# EAGLE board board (EAGLE 9.1.1)
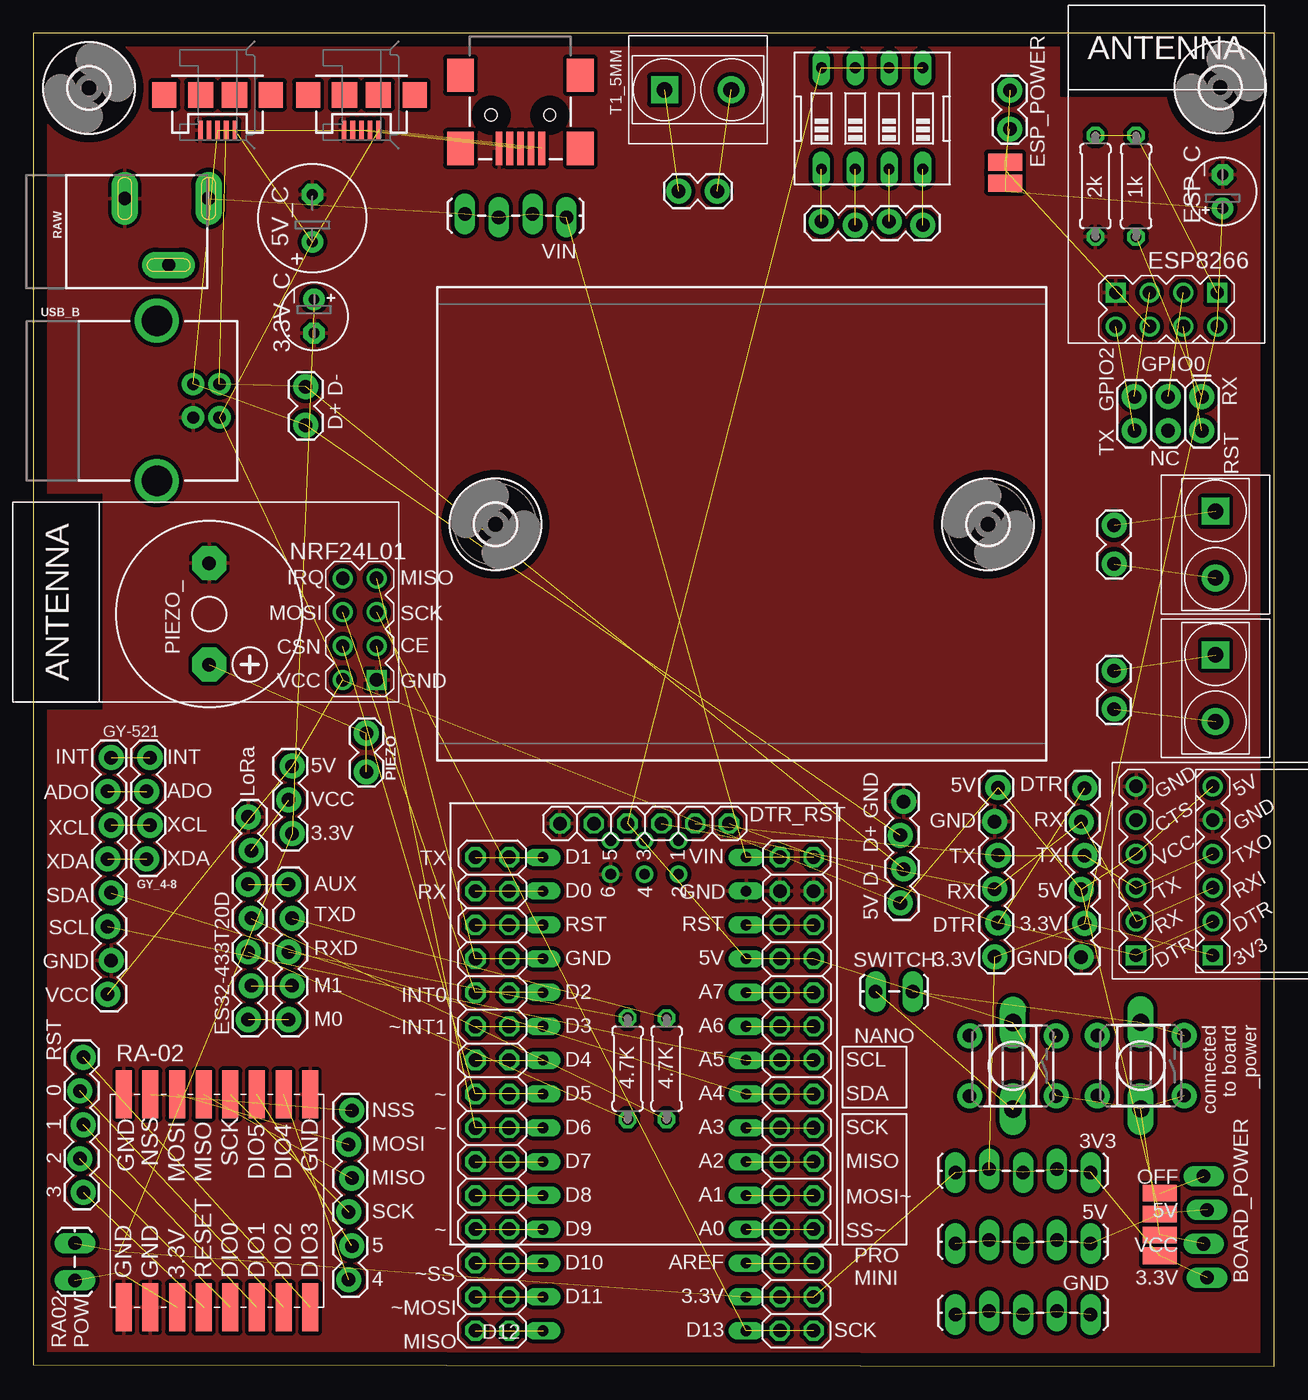
[diagram p0: board, top side]
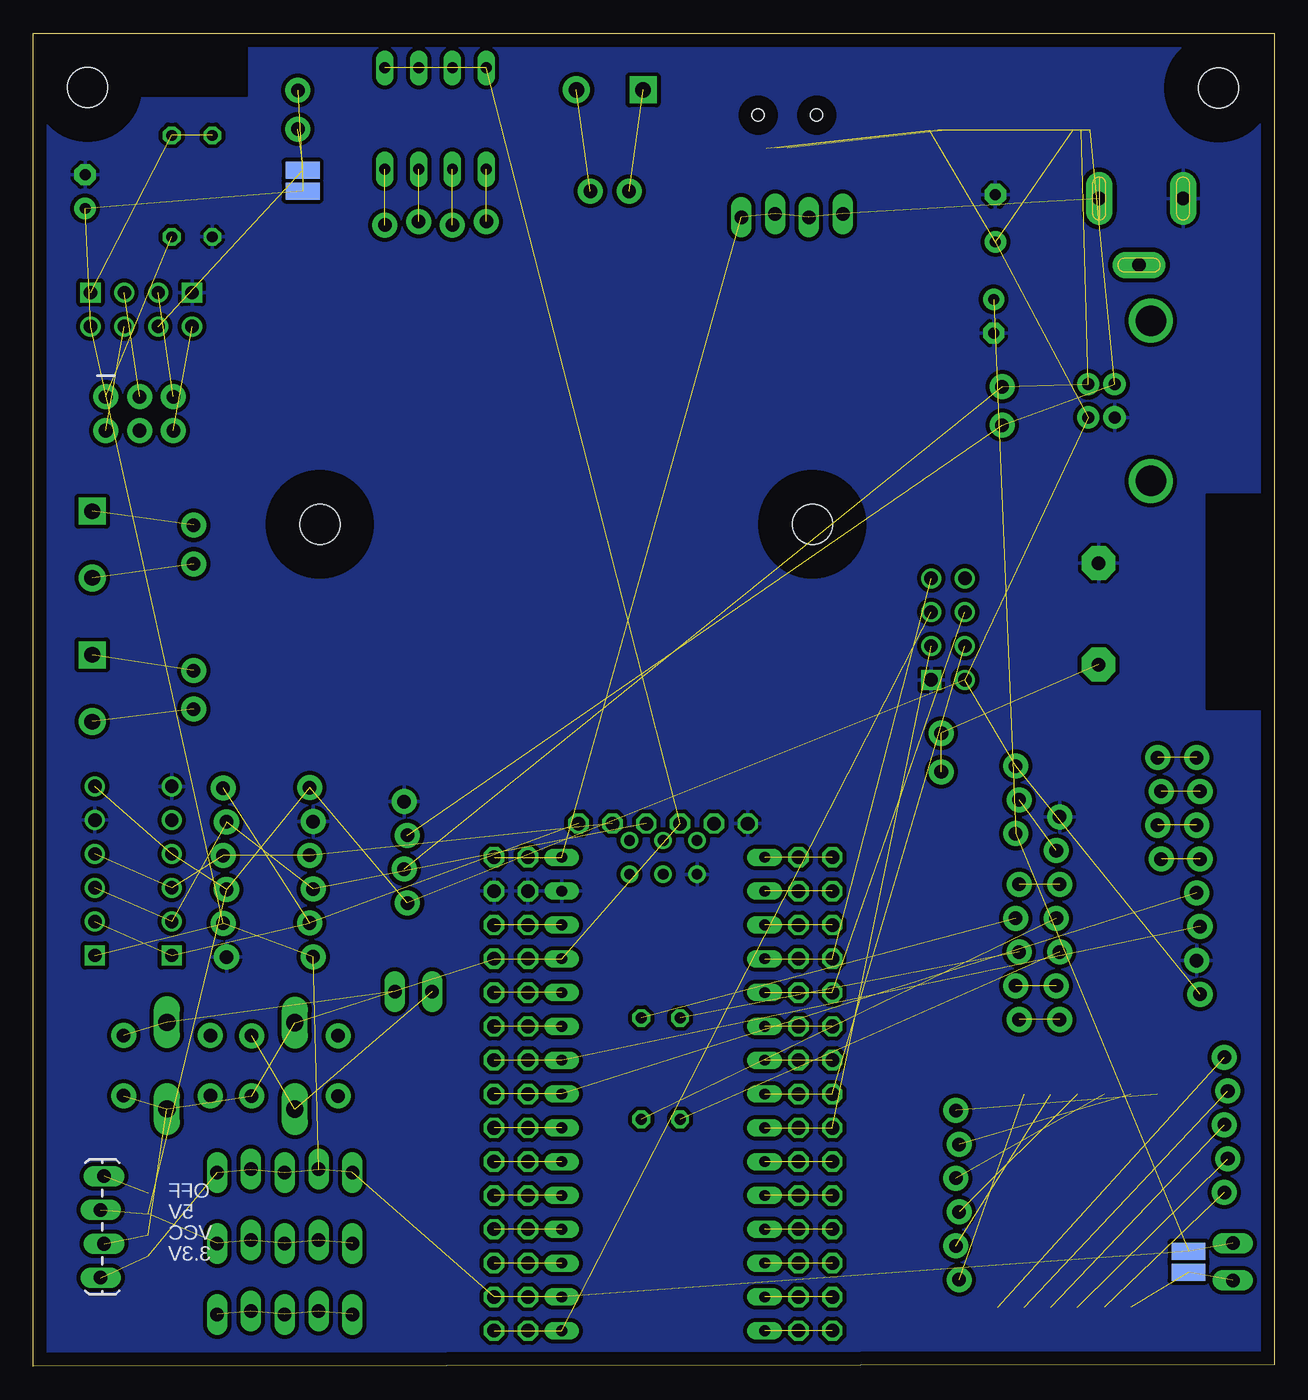
[diagram p1: board, bottom side, seen from below]

Size 93.2 x 100.13 mm. Coordinates in mm from the lower left corner, seen from the top.
Outline: 0,0.13 93.2,0 93.2,100.13 0,100.13 0,0.13
Copper layers (1*16): Top 0.035mm / dielectric 1.5mm / Bottom 0.035mm
Design rules "default": minimum track width 6mil, minimum drill 0.35mm, track to track 6mil, track to pad 6mil, pad to pad 6mil, via to via 6mil, smd to smd 6mil, copper to edge 40mil, drill to drill 6mil, minimum pad ring 10mil, minimum via ring 8mil, stop-mask expansion 4mil, vias tented up to drill 0mil, thermal gap 10mil
Net classes: 0 default: width 0.165 mm, drill 0.127 mm, clearance 0.152 mm; 1 power: width 0.762 mm, clearance 0.305 mm; 2 terminal: width 2.54 mm, clearance 0.305 mm
tRestrict: area 0.5,49.4 to 5.1,65.5; area 77.1,95.4 to 92.6,99.2
bRestrict: area 0.5,49.4 to 5.1,65.5; area 77.1,95.4 to 92.6,99.2

## Footprints (pad centres in the part's own frame; a part is rotated, then mirrored left to right if it is on the bottom)
1X03_LOCK = drill 1.016 pad 1.88: 1 0,0.127; 2 2.54,-0.127; 3 5.08,0.127
1X05_LOCK_LONGPADS = drill 1.016 long: 1 0,0; 2 2.54,-0.254; 3 5.08,0; 4 7.62,-0.254; 5 10.16,0
E2,5-5 = drill 0.813 pad 1.6: + -1.27,0 | drill 0.813 pad 1.6 octagon: - 1.27,0
E3,5-8 = drill 0.813 pad 1.6: + -1.778,0 | drill 0.813 pad 1.6 octagon: - 1.778,0
1X04_LOCK_LONGPADS = drill 1.016 long: 1 0,0; 2 2.54,-0.254; 3 5.08,0; 4 7.62,-0.254
USB-SERIAL-CP2102 = drill 1 square: 1 8.89,6.35 | drill 1: 2 8.89,3.81; 3 8.89,1.27; 4 8.89,-1.27; 5 8.89,-3.81; 6 8.89,-6.35
1X07_LOCK = drill 1.016 pad 1.88: 1 0,0.127; 2 2.54,-0.127; 3 5.08,0.127; 4 7.62,-0.127; 5 10.16,0.127; 6 12.7,-0.127; 7 15.24,0.127
0207/7 = drill 0.813 octagon: 1 -3.81,0; 2 3.81,0
WIRELESS-WIFI-ESP-01 = drill 1 square: A1 -8.89,3.81; D1 -8.89,-3.81 | drill 1: A2 -11.43,3.81; B1 -8.89,1.27; B2 -11.43,1.27; C1 -8.89,-1.27; C2 -11.43,-1.27; D2 -11.43,-3.81
2X3 = drill 1.016 pad 1.88: 1 0,0; 2 0,2.54; 3 2.54,0; 4 2.54,2.54; 5 5.08,0; 6 5.08,2.54
1X02_LOCK = drill 1.016 pad 1.88: 1 -0.178,0; 2 2.718,0
1X08_LOCK = drill 1.016 pad 1.88: 1 0,0.127; 2 2.54,-0.127; 3 5.08,0.127; 4 7.62,-0.127; 5 10.16,0.127; 6 12.7,-0.127; 7 15.24,0.127; 8 17.78,-0.127
1X04_LOCK = drill 1.016 pad 1.88: 1 0,0.127; 2 2.54,-0.127; 3 5.08,0.127; 4 7.62,-0.127
3,0 = hole 3: 0,0
1X05_LOCK = drill 1.016 pad 1.88: 1 0,0.127; 2 2.54,-0.127; 3 5.08,0.127; 4 7.62,-0.127; 5 10.16,0.127
1X02_LOCK_LONGPADS = drill 1.016 long: 1 -0.127,0; 2 2.667,0
1X06_LOCK = drill 1.016 pad 1.88: 1 0,0; 2 2.54,-0.254; 3 5.08,0; 4 7.62,-0.254; 5 10.16,0; 6 12.7,-0.254
USB-MICROB = smd 1.4 x 0.35: D+ -2.65,0; D- -2.65,-0.65; GND -2.65,1.3; ID -2.65,0.65; VBUS -2.65,-1.3 | smd 1.9 x 1.8: MT1 0,-4; MT2 0,4 | smd 1.9 x 1.9: P$1 0,-1.27; P$2 0,1.27
USB-MINIB = smd 2.5 x 0.5: D+ 2.5,0; D- 2.5,0.8; GND 2.5,-1.6; ID 2.5,-0.8; VBUS 2.5,1.6 | smd 2.5 x 2: S1 -3,4.5; S2 2.5,4.5; S3 -3,-4.5; S4 2.5,-4.5 | hole 0.9: 0,2.2; 0,-2.2
NANO = drill 0.8 long: 3.3V -10.16,24.13; 5V -10.16,-1.27; A0 -10.16,19.05; A1 -10.16,16.51; A2 -10.16,13.97; A3 -10.16,11.43; A4 -10.16,8.89; A5 -10.16,6.35; A6 -10.16,3.81; A7 -10.16,1.27; AREF -10.16,21.59; D2 5.08,1.27; D3 5.08,3.81; D4 5.08,6.35; D5 5.08,8.89; D6 5.08,11.43; D7 5.08,13.97; D8 5.08,16.51; D9 5.08,19.05; D10 5.08,21.59; D11 5.08,24.13; D12 5.08,26.67; D13 -10.16,26.67; GND -10.16,-6.35; GND1 5.08,-1.27; RAW -10.16,-8.89; RST -10.16,-3.81; RST1 5.08,-3.81; RX1 5.08,-6.35; TX0 5.08,-8.89 | drill 0.8: ICSP1 -5.08,-10.16; ICSP2 -5.08,-7.62; ICSP3 -2.54,-10.16; ICSP4 -2.54,-7.62; ICSP5 0,-10.16; ICSP6 0,-7.62
WIRELESS-NRF24L01 = drill 1 square: 1 -12.7,6.35 | drill 1: 2 -10.16,6.35; 3 -12.7,3.81; 4 -10.16,3.81; 5 -12.7,1.27; 6 -10.16,1.27; 7 -12.7,-1.27; 8 -10.16,-1.27
SMD1,27-2,54 = smd 1.27 x 2.54: 1 0,0
2X15 = drill 1.016 octagon: 1 -17.78,-1.27; 2 -17.78,1.27; 3 -15.24,-1.27; 4 -15.24,1.27; 5 -12.7,-1.27; 6 -12.7,1.27; 7 -10.16,-1.27; 8 -10.16,1.27; 9 -7.62,-1.27; 10 -7.62,1.27; 11 -5.08,-1.27; 12 -5.08,1.27; 13 -2.54,-1.27; 14 -2.54,1.27; 15 0,-1.27; 16 0,1.27; 17 2.54,-1.27; 18 2.54,1.27; 19 5.08,-1.27; 20 5.08,1.27; 21 7.62,-1.27; 22 7.62,1.27; 23 10.16,-1.27; 24 10.16,1.27; 25 12.7,-1.27; 26 12.7,1.27; 27 15.24,-1.27; 28 15.24,1.27; 29 17.78,-1.27; 30 17.78,1.27
F/CM12P = drill 1.016 pad 2.54 octagon: + 3.81,0; - -3.81,0
1X06/OCT = drill 1.016 octagon: 1 -6.35,0; 2 -3.81,0; 3 -1.27,0; 4 1.27,0; 5 3.81,0; 6 6.35,0
LORA-RA2-SMD = smd 3.6 x 1.2: 1 -8,7; 2 -8,5; 3 -8,3; 4 -8,1; 5 -8,-1; 6 -8,-3; 7 -8,-5; 8 -8,-7; 9 8,-7; 10 8,-5; 11 8,-3; 12 8,-1; 13 8,1; 14 8,3; 15 8,5; 16 8,7
POWER_JACK_SLOT = drill 1 pad 2 long: GND@1 2.58,7.5; GND@2 7.58,10.8; PWR 2.58,13.8
TACTILE_SWITCH_PTH_6.0MM = drill 1.016 pad 1.88: 1 -3.251,2.261; 2 3.251,2.261; 3 -3.251,-2.261; 4 3.251,-2.261
DTS-3 = drill 1.3 long: 1 -3.25,0; 2 3.25,0
EDG-04 = drill 0.813 long: 1 -3.81,-3.81; 2 -1.27,-3.81; 3 1.27,-3.81; 4 3.81,-3.81; 5 3.81,3.81; 6 1.27,3.81; 7 -1.27,3.81; 8 -3.81,3.81
H2-5.0-10.5X8.0MM = drill 1.168 pad 2.032 square: 1 0,2.5 | drill 1.168 pad 2.032: 2 0,-2.5
USB-SERIAL-FT232R = drill 1 square: 1 11.43,6.35 | drill 1: 2 11.43,3.81; 3 11.43,1.27; 4 11.43,-1.27; 5 11.43,-3.81; 6 11.43,-6.35
USB-B-PTH = drill 0.914 pad 1.676: D+ 4,1.25; D- 5.981,1.25; GND 4,-1.25; VBUS 5.981,-1.25 | drill 2.286: SHLD1 1.282,-6.02; SHLD2 1.282,6.02

## Placement (x,y rotation side)
3.3/5  [1X03_LOCK]  19.3,45.09 270 top
3.3V  [1X05_LOCK_LONGPADS]  79.4,14.55 180 top
3.3V_C  [E2,5-5]  21.08,78.87 270 top
5V  [1X05_LOCK_LONGPADS]  79.4,9.22 180 top
5V_C  [E3,5-8]  20.95,86.23 90 top
B1  BREADBOARDMINI  [BREADBOARD-MINI]  53.19,63.27 180 top
BOARD_POWER  [1X04_LOCK_LONGPADS]  87.88,14.27 270 bottom
CP2102_USB-SERIAL  USB-SERIAL-CP2102  [USB-SERIAL-CP2102]  97.46,37.21 180 top
ES32-433T20D  [1X07_LOCK]  16.26,26.04 90 top
ESP1  1k  [0207/7]  82.8,88.65 270 top
ESP2  2k  [0207/7]  79.76,88.65 90 top
ESP8266  [WIRELESS-WIFI-ESP-01]  85.09,89.53 90 top
ESP_C  [E2,5-5]  89.31,88.24 90 top
ESP_H  [2X3]  87.76,72.82 180 top
ESP_POW  [1X02_LOCK]  73.33,95.66 270 top
GND  [1X05_LOCK_LONGPADS]  79.4,3.89 180 top
GY-521  [1X08_LOCK]  5.71,27.94 90 top
GY_4-8  [1X04_LOCK]  8.64,45.72 270 top
H1  MOUNT-HOLE3.0  [3,0]  4.19,96.01 0 top
H2  MOUNT-HOLE3.0  [3,0]  89.13,96.06 0 top
H3  MOUNT-HOLE3.0  [3,0]  71.68,63.25 90 top
H4  MOUNT-HOLE3.0  [3,0]  34.7,63.25 270 top
J1  [1X05_LOCK]  19.3,26.04 90 top
J2  [1X02_LOCK_LONGPADS]  65.91,28.14 180 top
J3  [1X02_LOCK_LONGPADS]  3.12,9.12 270 top
J4  [1X04_LOCK]  66.8,85.85 180 top
J5  [1X06_LOCK]  23.93,19.2 270 top
J6  [1X05_LOCK]  3.63,23.22 270 top
J7  [1X06_LOCK]  78.69,30.73 90 top
J8  [1X04_LOCK]  65.23,34.8 90 top
J9  [1X06_LOCK]  72.19,30.76 90 top
MICRO_1  [USB-MICROB]  24.64,95.5 90 top
MICRO_2  [USB-MICROB]  13.84,95.5 90 top
MINI_1  USB_MINI-B_SMT  [USB-MINIB]  36.58,93.98 270 top
NANO  NANO  [NANO]  43.36,29.34 180 top
NRF24L01  [WIRELESS-NRF24L01]  13.08,57.91 180 top
PAD1  [SMD1,27-2,54]  72.97,88.87 90 top
PAD2  [SMD1,27-2,54]  72.97,90.45 90 top
PAD3  [SMD1,27-2,54]  6.45,8.64 90 bottom
PAD4  [SMD1,27-2,54]  6.45,7.06 90 bottom
PAD5  [SMD1,27-2,54]  72.97,88.27 90 bottom
PAD6  [SMD1,27-2,54]  72.97,89.84 90 bottom
PAD7  [SMD1,27-2,54]  84.58,8.28 270 top
PAD8  [SMD1,27-2,54]  84.58,11.43 270 top
PAD9  [SMD1,27-2,54]  84.58,9.86 270 top
PAD10  [SMD1,27-2,54]  84.58,13 270 top
PH1  [2X15]  57.33,20.45 90 top
PH2  [2X15]  34.47,20.45 90 top
PIEZO  [1X02_LOCK]  25.02,44.83 90 top
PIEZO_  [F/CM12P]  13.21,56.52 270 top
PIN1  [1X02_LOCK]  51.18,88.27 180 top
PIN2  [1X02_LOCK]  81.15,60.45 90 top
PIN3  [1X02_LOCK]  81.15,49.53 90 top
PROMINI_H  [1X06/OCT]  45.9,40.77 0 top
R1  4.7k  [0207/7]  47.55,22.35 270 top
R2  4.7K  [0207/7]  44.63,22.35 270 top
RA-02  [LORA-RA2-SMD]  13.79,12.42 90 top
RAW  [POWER_JACK_SLOT]  -0.64,90.3 270 top
S1  MOMENTARY-SWITCH-SPST-PTH-6.0MM  [TACTILE_SWITCH_PTH_6.0MM]  83.16,22.58 180 top
S2  MOMENTARY-SWITCH-SPST-PTH-6.0MM  [TACTILE_SWITCH_PTH_6.0MM]  73.56,22.56 180 top
S3  DTS-3  [DTS-3]  83.16,22.58 90 top
S4  DTS-3  [DTS-3]  73.56,22.56 90 top
SW1  [EDG-04]  62.99,93.73 0 top
T1_5MM  5mm  [H2-5.0-10.5X8.0MM]  49.91,95.88 90 top
T2_5MM  5mm  [H2-5.0-10.5X8.0MM]  88.77,61.72 0 top
T3_5MM  5mm  [H2-5.0-10.5X8.0MM]  88.77,50.93 0 top
U$1  USB-SERIAL-FT232R  [USB-SERIAL-FT232R]  94.23,37.21 180 top
USB_B  [USB-B-PTH]  8,72.52 0 top
USB_DATA  [1X02_LOCK]  20.45,73.41 270 top
VIN  [1X04_LOCK_LONGPADS]  32.41,86.56 0 top

## Library data of the parts
3.3/5 3.3V 5V ES32-433T20D ESP_POW GND GY-521 J1-J3 J5-J7 J9 PIEZO PIN1-PIN3 USB_DATA = SparkFun-Connectors
3.3V_C ESP_C = rcl; SPICEPREFIX: C
5V_C = resistor
B1 = SparkFun-Boards; PROD_ID: COMP-12034
BOARD_POWER GY_4-8 J4 J8 VIN = SparkFun-Connectors; PROD_ID: CONN-09696
CP2102_USB-SERIAL ESP8266 NRF24L01 U$1 = diy-modules
ESP1 ESP2 R1 R2 = rcl; SPICEPREFIX: R
ESP_H = SparkFun-Connectors; PROD_ID: CONN-11566; VALUE: FEMALE 2x3
H1-H4 = holes
MICRO_1 MICRO_2 = SparkFun-Connectors; PROD_ID: CONN-09505; SF_ID: PRT-08533
MINI_1 = SparkFun-Connectors; PROD_ID: CONN-08193; SF_ID: PRT-00587
NANO = Arduino-clone
PAD1-PAD10 = wirepad
PH1 PH2 = pinhead
PIEZO_ = buzzer; OC_FARNELL: unknown; OC_NEWARK: unknown
PROMINI_H = pinhead_v2
RA-02 = LikeCircuit
RAW = SparkFun-Connectors; PROD_ID: PRT-00119
S1 S2 = SparkFun-Switches; PROD_ID: SWCH-08441; SF_SKU: COM-00097
S3 S4 = switch-tact
SW1 = special
T1_5MM T2_5MM T3_5MM = Seeed-Connector
USB_B = SparkFun-Connectors; PROD_ID: CONN-08278; SF_ID: PRT-00139

## Nets
3.3V [power]: 3.3/5.3 3.3V.1 3.3V.2 3.3V.3 3.3V.4 3.3V.5 3.3V_C.+ BOARD_POWER.4 CP2102_USB-SERIAL.1 ESP8266.D2 ESP_C.+ ESP_POW.1 J3.1 J7.2 J9.1 NANO.3.3V PAD1.1 PAD3.1 PAD5.1 PAD7.1 PH1.3 PH1.4
5V [power]: 3.3/5.1 5V.1 5V.2 5V.3 5V.4 5V.5 5V_C.+ BOARD_POWER.2 CP2102_USB-SERIAL.6 GY-521.1 J7.3 J8.1 J9.6 MICRO_1.VBUS MICRO_2.VBUS MINI_1.VBUS NRF24L01.2 PAD8.1 U$1.4 USB_B.VBUS
A5: GY-521.3 NANO.A5 PH1.17 PH1.18
A6: NANO.A6 PH1.19 PH1.20
A7: NANO.A7 PH1.21 PH1.22
CE_NRF: NANO.D6 NRF24L01.3 PH2.13 PH2.14
CSN_NRF: NANO.D5 NRF24L01.4 PH2.15 PH2.16
D+_5PIN: J8.3 MICRO_1.D+ MICRO_2.D+ MINI_1.D+ USB_B.D+ USB_DATA.2
D-_5PIN: J8.2 MICRO_1.D- MICRO_2.D- MINI_1.D- USB_B.D- USB_DATA.1
GND [power]: 3.3V_C.- 5V_C.- CP2102_USB-SERIAL.5 ES32-433T20D.7 ESP2.1 ESP8266.A1 ESP_C.- GY-521.2 J7.1 J8.4 J9.5 MICRO_1.GND MICRO_2.GND MINI_1.GND NANO.GND NANO.ICSP6 NRF24L01.1 PH1.27 PH1.28 PIEZO_.- PROMINI_H.1 RA-02.1 RA-02.2 RA-02.9 RA-02.16 RAW.GND@1 U$1.6 USB_B.GND
MISO_NRF: NANO.GND1 NRF24L01.7 PH2.23 PH2.24
MOSI_NRF: NANO.D2 NRF24L01.6 PH2.21 PH2.22
N$1: ES32-433T20D.2 J1.2
N$2: GY-521.5 GY_4-8.4
N$3: NANO.AREF PH1.5 PH1.6
N$4: NANO.A0 PH1.7 PH1.8
N$5: NANO.A1 PH1.9 PH1.10
N$6: NANO.A2 PH1.11 PH1.12
N$7: NANO.A3 PH1.13 PH1.14
N$8: GY-521.6 GY_4-8.3
N$9: GY-521.7 GY_4-8.2
N$10: GY-521.8 GY_4-8.1
N$11: 3.3/5.2 ES32-433T20D.6
N$12: ES32-433T20D.1 J1.1
N$13: J1.4 R1.1
N$14: J1.3 R2.1
N$15: ES32-433T20D.4 R1.2
N$16: NANO.D12 PH2.1 PH2.2
N$17: NANO.D11 PH2.3 PH2.4
N$18: NANO.D10 PH2.5 PH2.6
N$19: NANO.D9 PH2.7 PH2.8
N$20: NANO.D8 PH2.9 PH2.10
N$21: NANO.D7 PH2.11 PH2.12
N$22: ES32-433T20D.5 J1.5
N$23 [terminal]: PIN1.2 T1_5MM.1
N$24: NANO.D4 PH2.17 PH2.18
N$25: NANO.D3 PH2.19 PH2.20
N$26 [terminal]: PIN1.1 T1_5MM.2
N$27 [terminal]: PIN2.2 T2_5MM.1
N$28: NANO.RST1 PH2.25 PH2.26
N$29: NANO.RX1 PH2.27 PH2.28
N$30: NANO.TX0 PH2.29 PH2.30
N$31 [terminal]: PIN2.1 T2_5MM.2
N$32 [terminal]: PIN3.2 T3_5MM.1
N$33 [terminal]: PIN3.1 T3_5MM.2
N$34 [power]: PIEZO.1 PIEZO.2 PIEZO_.+
N$35: GND.1 GND.2 GND.3 GND.4 GND.5
N$36 [power]: BOARD_POWER.3 NANO.5V PAD9.1 PH1.23 PH1.24 PROMINI_H.3 S1.1 S2.1 S3.1 S4.2 SW1.5 SW1.6 SW1.7 SW1.8
N$37 [power]: J2.1 S1.3 S3.2
N$38: ES32-433T20D.3 R2.2
N$39 [power]: J4.1 SW1.4
N$40 [power]: J4.2 SW1.3
N$41 [power]: J4.3 SW1.2
N$42 [power]: J4.4 SW1.1
N$43 [power]: J2.2 S2.3 S4.1
N$44: J6.1 RA-02.8
N$45: J6.2 RA-02.7
N$46: J6.3 RA-02.6
N$47: J6.4 RA-02.5
N$48: J6.5 RA-02.4
N$49: J5.1 RA-02.15
N$50: J5.2 RA-02.14
N$51: J5.3 RA-02.13
N$52: J5.4 RA-02.12
N$53: J5.5 RA-02.11
N$54: J5.6 RA-02.10
N$55 [power]: ESP8266.B2 ESP_POW.2 PAD2.1 PAD6.1
N$57: CP2102_USB-SERIAL.3 J7.5 J9.3 PROMINI_H.4 U$1.2
N$58 [power]: ESP1.1 ESP2.2 ESP8266.D1
N$59: ESP8266.C2 ESP_H.2
N$60: ESP8266.C1 ESP_H.3
N$61 [power]: ESP1.2 ESP_H.1
N$62: CP2102_USB-SERIAL.4 J7.4 J9.4 PROMINI_H.5 U$1.3
N$63: ESP8266.B1 ESP_H.5
N$64: ESP8266.A2 ESP_H.6
N$65: BOARD_POWER.1 PAD10.1
N$66: CP2102_USB-SERIAL.2 J7.6 J9.2 PROMINI_H.6 U$1.1
N$76: J3.2 PAD4.1 RA-02.3
RST: NANO.RST PH1.25 PH1.26
SCK_NRF: NANO.D13 NRF24L01.5 PH1.1 PH1.2
SDA_GY521: GY-521.4 NANO.A4 PH1.15 PH1.16
VIN [power]: NANO.RAW PH1.29 PH1.30 RAW.PWR VIN.1 VIN.2 VIN.3 VIN.4

## Tracks (layer width: path | path; a pad name or v marks a point on that pad's centre or on a via)
3.3V  (21 unrouted)
5V  (19 unrouted)
A5  (3 unrouted)
A6  (2 unrouted)
A7  (2 unrouted)
CE_NRF  (3 unrouted)
CSN_NRF  (3 unrouted)
D+_5PIN  (5 unrouted)
D-_5PIN  (5 unrouted)
GND
  pour Top: 0.13,100.08 0.13,0.13 93.22,0.13 93.22,100.08
  pour Bottom: 0,99.95 0,0 93.22,0 93.22,99.95 0,100.08
MISO_NRF  (3 unrouted)
MOSI_NRF  (3 unrouted)
N$1  (1 unrouted)
N$2  (1 unrouted)
N$3  (2 unrouted)
N$4  (2 unrouted)
N$5  (2 unrouted)
N$6  (2 unrouted)
N$7  (2 unrouted)
N$8  (1 unrouted)
N$9  (1 unrouted)
N$10  (1 unrouted)
N$11  (1 unrouted)
N$12  (1 unrouted)
N$13  (1 unrouted)
N$14  (1 unrouted)
N$15  (1 unrouted)
N$16  (2 unrouted)
N$17  (2 unrouted)
N$18  (2 unrouted)
N$19  (2 unrouted)
N$20  (2 unrouted)
N$21  (2 unrouted)
N$22  (1 unrouted)
N$23  (1 unrouted)
N$24  (2 unrouted)
N$25  (2 unrouted)
N$26  (1 unrouted)
N$27  (1 unrouted)
N$28  (2 unrouted)
N$29  (2 unrouted)
N$30  (2 unrouted)
N$31  (1 unrouted)
N$32  (1 unrouted)
N$33  (1 unrouted)
N$34  (2 unrouted)
N$35  (4 unrouted)
N$36  (13 unrouted)
N$37  (2 unrouted)
N$38  (1 unrouted)
N$39  (1 unrouted)
N$40  (1 unrouted)
N$41  (1 unrouted)
N$42  (1 unrouted)
N$43  (2 unrouted)
N$44  (1 unrouted)
N$45  (1 unrouted)
N$46  (1 unrouted)
N$47  (1 unrouted)
N$48  (1 unrouted)
N$49  (1 unrouted)
N$50  (1 unrouted)
N$51  (1 unrouted)
N$52  (1 unrouted)
N$53  (1 unrouted)
N$54  (1 unrouted)
N$55  (3 unrouted)
N$57  (4 unrouted)
N$58  (2 unrouted)
N$59  (1 unrouted)
N$60  (1 unrouted)
N$61  (1 unrouted)
N$62  (4 unrouted)
N$63  (1 unrouted)
N$64  (1 unrouted)
N$65  (1 unrouted)
N$66  (4 unrouted)
N$76  (2 unrouted)
RST  (2 unrouted)
SCK_NRF  (3 unrouted)
SDA_GY521  (3 unrouted)
VIN  (7 unrouted)

## Text on the board
tPlace: ESP_POWER | 2k | 1k | VIN | GPIO0 | RX | D- | GPIO2 | D+ | RST | NC | TX | IRQ | MISO | MOSI | SCK | CSN | CE | VCC | GND | INT | INT | ADO | 5V | 5V | DTR | ADO | LoRa | VCC | RX | XCL | DTR_RST | GND | GND | XCL | 3.3V | TX | VIN | TX | TX | XDA | D1 | 5 | 3 | 1 | D+ | XDA | SDA | AUX | RX | 6 | 4 | 2 | GND | D- | RX | 5V | D0 | RST | DTR | 3.3V | SCL | TXD | RST | 5V | GND | RXD | 5V | 3.3V | GND | GND | SWITCH | A7 | VCC | M1 | INT0 | D2 | ~INT1 | A6 | connected / to board / _power | M0 | D3 | NANO | RST | A5 | D4 | SCL | ~ | 4.7K | 4.7K | A4 | 0 | D5 | SDA | NSS | 1 | ~ | A3 | D6 | SCK | 3V3 | MOSI | A2 | 2 | D7 | MISO | OFF | 3 | MISO | A1 | D8 | MOSI~ | 5V | 5V | SCK | ~ | A0 | D9 | SS~ | VCC | PRO / MINI | 5 | AREF | ~SS | D10 | GND | 3.3V | 4 | 3.3V | BOARD_POWER | ~MOSI | D11 | D13 | MISO | D12 | SCK | RA02 / POW
bPlace: OFF | 5V | VCC | 3.3V
silktop: TOP
silkbottom: BOT